# Allegro board oscilatorWien3.brd
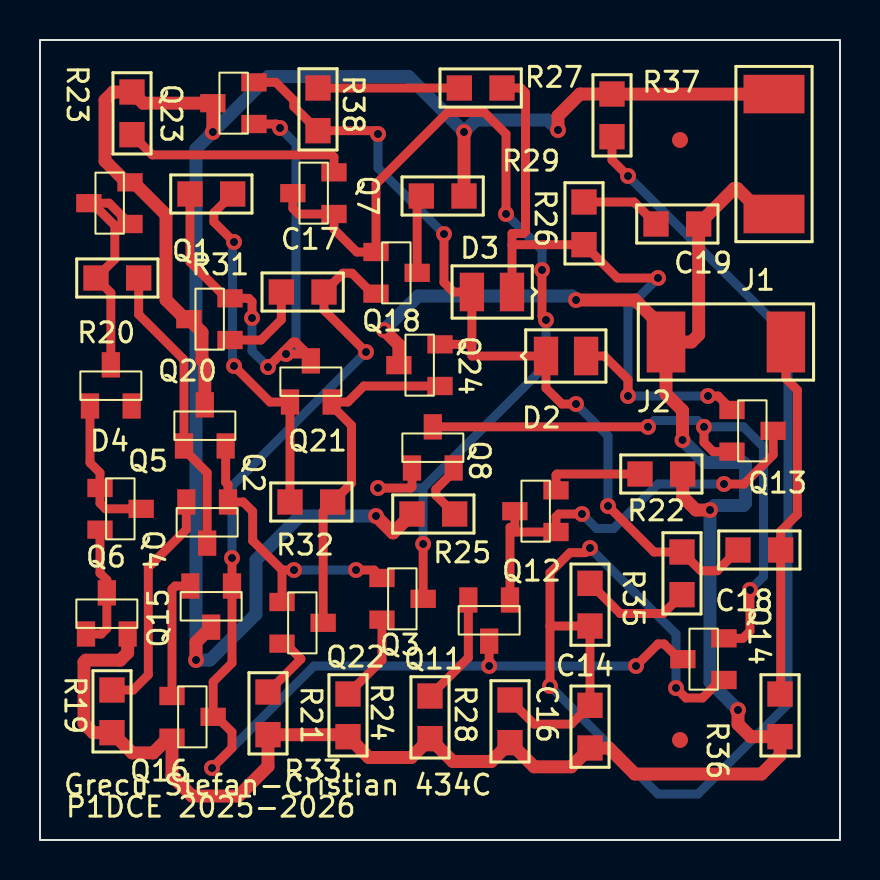
[diagram p0: board, top side]
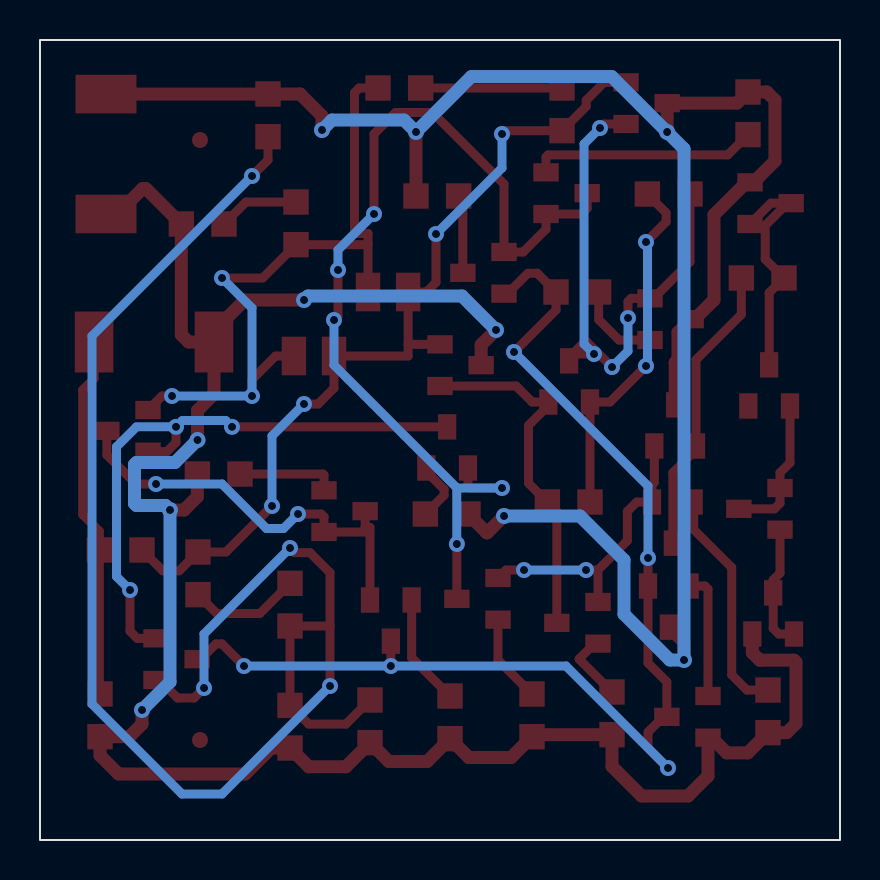
[diagram p1: board, bottom side, seen from below]

Outline 40 x 40 mm; copper layers: TOP, BOTTOM. Coordinates in mm from the lower left corner of the outline.
Outline path: rectangle 0,0 40,40

## Design rules (mm)
nets with their own width: min track width 0.45; nets N00205 N00310 N00314 N00318 N00332 N00346 N00397 N00507 N00543 N00654 N00701 N00847 N00851 N01052 N01056 N01336 N01569 N02051 N02116 N02144 N02274 N02283 N02412 N02667 N02782 N02871 N02919 N07776 N021020
nets with their own width: min track width 0.65; nets GND N00658

## Placement (name value [footprint] x y rotation side)
C14  1n  [SMC0805]  27.5 10.7 90 top
C16  1n  [SMC0805]  27.5 4.6 90 top
C17  10p  [SMC0805]  14.2 27.4 180 top
C18  4.7u  [SMC0805]  34.9 14.5 0 top
C19  4.7u  [SMC0805]  30.8 30.8 0 top
D2  1N4148  [SMD0805]  25.3 24.2 0 top
D3  1N4148  [SMD0805]  23.6 27.4 180 top
D4  BZX84C8V2  [TO236AA]  2.5 21.7 270 top
J1  CON2  [SMR2512]  36.7 31.3 90 top
J2  CON2  [SMR2512]  31.3 24.9 0 top
NOREF  -  [unnamed]  32 35 0 top
NOREF#2  -  [unnamed]  32 5 0 top
Q1  J309  [TO236AA]  4.5 30.8 0 top
Q2  BC817  [TO236AA]  7.2 19.7 270 top
Q3  BC817  [TO236AA]  17.1 13.1 180 top
Q4  BC817  [TO236AA]  9.4 16.9 90 top
Q5  BC817  [TO236AA]  3 17.6 180 top
Q6  BC817  [TO236AA]  2.3 10.3 270 top
Q7  BC807  [TO236AA]  14.7 31.3 0 top
Q8  BC807  [TO236AA]  18.6 18.6 270 top
Q11  BC817  [TO236AA]  23.5 12 90 top
Q12  BC817  [TO236AA]  25.8 15.4 0 top
Q13  BC807  [TO236AA]  34.6 21.5 180 top
Q14  BC807  [TO236AA]  34.2 8 0 top
Q15  BC817  [TO236AA]  9.6 12.7 90 top
Q16  BC817  [TO236AA]  6.6 7.2 180 top
Q18  BC817  [TO236AA]  16.8 29.4 180 top
Q20  BC817  [TO236AA]  9.5 25 0 top
Q21  BC817  [TO236AA]  12.5 21.9 270 top
Q22  BC817  [TO236AA]  12.1 11.9 180 top
Q23  BC817  [TO236AA]  10.7 35.8 0 top
Q24  BC807  [TO236AA]  20 22.7 0 top
R19  330  [SMR0805]  3.6 7.5 270 top
R20  4.7k  [SMR0805]  2.8 28.1 0 top
R21  330  [SMR0805]  15.4 7.3 270 top
R22  470m  [SMR0805]  30 18.3 0 top
R23  330  [SMR0805]  4.6 37.4 270 top
R24  470m  [SMR0805]  19.5 7.2 270 top
R25  150  [SMR0805]  18.6 16.3 0 top
R26  10k  [SMR0805]  27.2 31.9 270 top
R27  10k  [SMR0805]  23.1 37.6 180 top
R28  22k  [SMR0805]  23.5 7 270 top
R29  150  [SMR0805]  21.2 32.2 180 top
R31  1.5k  [SMR0805]  7.5 32.3 0 top
R32  680  [SMR0805]  12.5 16.9 0 top
R33  82  [SMR0805]  11.4 7.4 270 top
R35  10k  [SMR0805]  32.1 14.4 270 top
R36  820  [SMR0805]  37 7.3 270 top
R37  22k  [SMR0805]  28.6 37.3 270 top
R38  22k  [SMR0805]  13.9 37.6 270 top

## Library data of the parts
C14 C16-C19 = C
D2 = 1N4148_8
D3 = 1N4148_6
D4 = BZX84C8V2_3
J1 J2 = CON2
Q1 = J309_4
Q2-Q6 Q11 Q12 Q15 Q16 Q20-Q23 = BC817_0
Q7 = BC807_2
Q8 Q13 Q24 = BC807_0
Q14 = BC807_1
Q18 = BC817_1
R19-R29 R31-R33 R35-R38 = R

## Footprints (pads in the part's own frame, mm; a bottom-side part is the same pattern mirrored in y, then rotated)
SMC0805
  rect 1.27x1.27 smd: 1(0,0) 2(2.134,0)
SMD0805
  rect 1.219x1.93 smd: A(2.007,0) C(0,0)
SMR0805
  rect 1.27x1.27 smd: 1(0,0) 2(2.134,0)
SMR2512
  rect 1.93x3.048 smd: 1(0,0) 2(5.994,0)
TO236AA
  rect 1.27x0.914 smd: 1(0,0) 2(0,2.083) 3(-2.057,1.041)
unnamed
  round 0.8 smd: (0,0)

## Nets
GND: C16.1 C19.2 J1.1 J2.1 Q6.2(E) Q16.2(E) Q24.3 R19.2 R21.2 R22.2 R24.2 R28.2 R33.2 R36.2
N00205: Q5.2(E) Q6.1 Q6.3
N00310: Q3.2(E) R21.1
N00314: Q4.2(E) R19.1
N00318: Q2.2(E) Q3.1 Q4.1 Q22.1
N00332: Q2.1 Q4.3 R20.2
N00346: D4.3 Q1.1 Q1.3 R20.1
N00397: D4.1 Q5.1 Q5.3
N00507: Q3.3 Q7.1 Q7.3 Q8.1 Q18.1
N00543: Q7.2(E) R23.2
N00654: Q8.2(E) R25.2
N00658: J1.2 Q1.2(S) Q2.3 Q15.3 Q20.3 Q23.3 R23.1 R25.1 R29.1 R37.1
N00701: Q8.3 Q13.2(E) Q14.2(E)
N00847: Q11.1 Q12.1 Q12.3 Q13.3
N00851: C17.1 Q11.3 Q14.3 Q15.1 Q16.3 Q18.2(E)
N01052: Q11.2(E) R24.1
N01056: Q12.2(E) R22.1
N01336: Q15.2(E) Q16.1
N01569: Q18.3 R29.2
N02051: Q21.1 R31.2 R32.1
N02116: C17.2 Q20.1
N02144: Q21.2(E) Q22.3 Q24.1 R32.2
N02274: Q20.2(E) Q21.3 Q23.1 R31.1
N02283: C18.1 D2.C(CAT) D3.A Q23.2(E) Q24.2(E) R35.1 R38.2
N02412: C14.1 C16.2 Q14.1 R28.1 R37.2
N02667: C14.2 R35.2
N02782: C18.2 J2.2 R36.1
N02871: D2.A D3.C(CAT) Q13.1 R26.2 R27.1
N02919: C19.1 R26.1
N07776: R27.2 R38.1
N021020: Q22.2(E) R33.1

Pads without a net: D4 2

## Via types
v1: diameter 0.8, hole 0.4, TOP to BOTTOM, 44 vias

## Routing (per net, layer and track width the routed paths; a pad name or vN(x,y) marks a point on that pad's centre or on a via; arc(x,y) is an arc through that point)
GND: length 110.8
  TOP w0.65: v1(34.9,6.5) 34.9,5.8 35.53,5.17 R36.2 37,4.23 36.07,3.3 29.74,3.3 28.44,4.6 C16.1 26.56,3.66 24.71,3.66 R28.2 22.56,3.93 20.64,3.93 R24.2 18.56,4.13 16.44,4.13 R21.2 15.3,5.27 R33.2 11.4,3.68 9.92,2.2 7.6,2.2 6.6,3.2 Q16.2 6.42,5.12 5.66,4.36 4.61,4.36 R19.2 2.66,5.37 2.2,5.83 2.2,8.89 2.3,8.99 4.01,8.99 4.38,9.36 Q6.2 ; Q24.3 17.94,24.76 v1(17.2,25.5) ; J2.1 32.57,24.9 32.93,25.26 C19.2 34.7,32.57 34.87,32.57 36.14,31.3 J1.1 ; J2.1 31.3,25.46 29.76,27 v1(26.8,27) ; J2.1 31.3,22.3 32.12,21.48 v1(32.12,20) ; v1(33.5,16.5) 32.8,16.5 32.13,17.16 R22.2
  BOTTOM w0.65: v1(34.9,6.5) 33.5,7.9 v1(33.5,16.5) 33.73,16.73 35.17,16.73 35.27,16.82 35.27,18.77 35.17,18.88 33.25,18.88 v1(32.12,20) ; v1(26.8,27) 26.6,27.2 18.9,27.2 v1(17.2,25.5)
N00205: length 6.2
  TOP w0.45: Q6.1 3.06,10.3 3.34,10.58 Q6.3 3.34,13 3,13.34 Q5.2
N00310: length 4.4
  TOP w0.45: R21.1 17.1,9 Q3.2
N00314: length 11.6
  TOP w0.45: Q4.2 7.32,15.53 5.42,13.62 5.42,8.26 4.66,7.5 R19.1
N00318: length 14.6
  TOP w0.45: Q2.2 9.28,17.89 9.4,17.77 Q4.1 10.16,16.9 10.63,16.43 10.63,14.97 12.1,13.5 ; Q22.1 12.1,13.5 ; 12.1,13.5 v1(12.7,13.5) ; v1(15.8,13.5) 16.7,13.5 Q3.1
  BOTTOM w0.45: v1(12.7,13.5) v1(15.8,13.5)
N00332: length 14.7
  TOP w0.45: R20.2 4.93,26.28 7.2,24.01 Q2.1 7.2,19.52 8.36,18.36 Q4.3
N00346: length 11.9
  TOP w0.45: D4.3 3.54,27.36 R20.1 3.74,29.04 3.74,30.72 2.62,31.84 Q1.3 3.46,31.84 Q1.1
N00397: length 7.2
  TOP w0.45: Q5.3 3.28,16.56 3,16.84 Q5.1 3,18.36 2.5,18.86 D4.1
N00507: length 49.6
  TOP w0.45: v1(25.1,28.5) 25.1,26.2 v1(25.3,26) ; Q7.3 12.64,31.58 12.92,31.3 Q7.1 14.7,30.54 15.84,29.4 Q18.1 16.8,32.8 20.38,36.38 22.23,36.38 23.3,35.3 v1(23.3,31.3) ; Q8.1 18.6,17.66 18.54,17.6 v1(16.9,17.6) ; Q3.3 v1(19.16,14.8)
  BOTTOM w0.45: v1(25.3,26) 25.3,23.74 19.16,17.6 ; v1(25.1,28.5) 25.1,29.5 v1(23.3,31.3) ; 19.16,17.6 v1(19.16,14.8) ; 19.16,17.6 v1(16.9,17.6)
N00543: length 11.3
  TOP w0.45: Q7.2 14.7,34.14 14.59,34.26 5.61,34.26 R23.2
N00654: length 3.1
  TOP w0.45: R25.2 19.79,17.24 19.79,17.53 20.68,18.42 Q8.2
N00658: length 104.8
  TOP w0.65: v1(25.9,35.5) 25.9,36.2 27,37.3 R37.1 28.61,37.29 J1.2 ; v1(8.64,35.4) Q23.3 5.16,36.84 R23.1 3.66,37.4 3.25,36.99 3.25,33.95 4.32,32.88 Q1.2 4.68,32.88 6.3,31.26 6.3,27.01 7.26,26.04 Q20.3 8.1,25.38 8.1,24.01 8.24,23.87 Q2.3 ; v1(21.2,35.4) R29.1 ; R25.1 17.66,15.36 17.64,15.36 v1(16.8,16.2) ; v1(7.8,9) 7.8,9.88 Q15.3
  BOTTOM w0.65: v1(16.8,16.2) 13,16.2 10.8,14 10.8,11.3 8.5,9 v1(7.8,9) 7.8,34.56 v1(8.64,35.4) 11.41,38.17 18.43,38.17 v1(21.2,35.4) 21.8,36 25.4,36 v1(25.9,35.5)
N00701: length 30.5
  TOP w0.45: v1(35.5,12.5) 35.5,10.44 35.14,10.08 Q14.2 ; Q8.3 v1(30.4,20.66) ; Q13.2 33.66,19.42 33.2,19.88 v1(33.2,20.66)
  BOTTOM w0.45: v1(35.5,12.5) 36.17,13.18 36.17,19.66 35.17,20.66 v1(33.2,20.66) 32.88,20.98 30.72,20.98 v1(30.4,20.66)
N00847: length 21.7
  TOP w0.45: v1(34.2,17.8) 35.2,17.8 36.66,19.26 Q13.3 ; 23.74,15.63 23.5,15.63 Q11.1 ; 23.74,15.63 23.74,15.4 Q12.1 25.8,16.16 25.94,16.3 v1(27.1,16.3) ; 23.74,15.63 Q12.3
  BOTTOM w0.45: v1(34.2,17.8) 30.9,17.8 28.68,15.57 27.82,15.57 v1(27.1,16.3)
N00851: length 59.8
  TOP w0.45: Q11.3 v1(22.46,8.7) ; Q14.3 31.96,9.04 31.2,9.8 30.9,9.8 v1(29.8,8.7) ; v1(16.3,24.4) 14.2,26.5 C17.1 15.14,28.34 15.6,28.34 16.62,27.32 Q18.2 ; v1(8.6,3.6) 9.6,4.6 9.6,5.4 8.84,6.16 Q16.3 8.66,7.91 9.6,8.85 Q15.1 v1(9.6,14.1)
  BOTTOM w0.45: v1(29.8,8.7) v1(22.46,8.7) 13.7,8.7 v1(8.6,3.6) ; v1(9.6,14.1) 9.6,17.7 v1(16.3,24.4)
N01052: length 5.6
  TOP w0.45: R24.1 21.42,9.12 Q11.2
N01056: length 5
  TOP w0.45: Q12.2 25.8,18.24 25.86,18.3 R22.1
N01336: length 6.3
  TOP w0.45: Q15.2 6.76,12.7 6.6,12.54 Q16.1
N01569: length 3.9
  TOP w0.45: Q18.3 18.86,31.99 R29.2
N02051: length 18
  TOP w0.45: v1(9.7,29.9) 8.69,30.91 8.69,31.36 R31.2 ; v1(9.7,23.7) 11.5,21.9 Q21.1 R32.1
  BOTTOM w0.45: v1(9.7,29.9) 9.62,29.82 9.62,23.77 v1(9.7,23.7)
N02116: length 4.4
  TOP w0.45: C17.2 12.07,26.02 11.05,25 Q20.1
N02144: length 17.8
  TOP w0.45: Q24.1 16.19,22.7 15.39,21.9 Q21.2 14.58,21.72 15.57,20.73 15.57,17.84 R32.2 14.16,16.42 Q22.3
N02274: length 28.7
  TOP w0.45: v1(12,35.6) 11.8,35.8 Q23.1 ; R31.1 7.5,28.91 9.32,27.08 Q20.2 10.44,27.08 10.6,26.92 v1(10.6,26.1) ; v1(11.4,23.65) 12.65,24.9 12.78,24.9 13.54,24.14 Q21.3 13.2,24.3 v1(12.3,24.3)
  BOTTOM w0.45: v1(12,35.6) 12.8,34.8 12.8,24.8 v1(12.3,24.3) ; v1(11.4,23.65) 10.6,24.45 v1(10.6,26.1)
N02283: length 43.8
  TOP w0.45: 21.59,24.78 D3.A 20.68,27.4 20.2,27.88 v1(20.2,30.3) ; 21.59,24.78 21.59,24.2 D2.C 25.3,22.6 26.1,21.8 v1(26.8,21.8) ; 21.59,24.78 Q24.2 ; v1(28.4,16.7) 30.7,14.4 R35.1 33.04,13.46 33.86,13.46 C18.1 ; v1(16.9,35.3) 16.73,35.47 R38.2 12.69,36.68 12.69,36.98 11.79,37.88 Q23.2
  BOTTOM w0.45: v1(20.2,30.3) 16.9,33.6 v1(16.9,35.3) ; v1(26.8,21.8) 28.4,20.2 v1(28.4,16.7)
N02412: length 78.8
  TOP w0.45: R37.2 28.6,34 v1(29.4,33.2) ; R28.1 24.71,5.79 26.56,5.79 C16.2 C14.1 25.5,10.7 ; v1(25.5,7.7) 25.5,10.7 ; 25.5,10.7 25.5,13.37 26.5,14.37 27.27,14.37 v1(27.5,14.6) ; v1(31.8,7.6) 32.3,7.1 33.12,7.1 34.02,8 Q14.1
  BOTTOM w0.45: v1(29.4,33.2) 37.4,25.2 37.4,6.8 32.9,2.3 30.9,2.3 v1(25.5,7.7) ; v1(31.8,7.6) 31.8,10.3 v1(27.5,14.6)
N02667: length 5.6
  TOP w0.45: C14.2 29.01,11.33 31.16,11.33 R35.2
N02782: length 18.2
  TOP w0.45: J2.2 37.29,23.07 37.87,22.5 37.87,16.27 37.03,15.44 C18.2 37.03,7.33 R36.1
N02871: length 35.3
  TOP w0.45: 23.6,29.77 23.6,30.32 24.18,30.32 24.27,30.43 24.27,37.36 24.04,37.6 R27.1 ; 23.6,29.77 R26.2 28.87,28.1 v1(30.9,28.1) ; 23.6,29.77 D3.C ; D2.A 28.22,24.2 29.4,23.02 v1(29.4,22.2) ; v1(33.4,22.2) 33.9,22.2 Q13.1
  BOTTOM w0.45: v1(33.4,22.2) v1(29.4,22.2) 29.4,26.6 v1(30.9,28.1)
N02919: length 4.1
  TOP w0.45: C19.1 29.7,31.9 R26.1
N07776: length 7.1
  TOP w0.45: R38.1 R27.2
N021020: length 3.6
  TOP w0.45: R33.1 13.04,9.04 13.04,9.06 12.28,9.82 Q22.2

## Text on the board
Ref Des/Silkscreen Top: Grecu Stefan-Cristian 434C | P1DCE 2025-2026
XSECTION_CHART: *  SURFACE | L1 TOP CONDUCTOR | *  DIELECTRIC | L2 BOTTOM CONDUCTOR | DESIGN CROSS SECTION CHART | ___________________________ | TOTAL THICKNESS 0.26416 MM | 1-2
NCLEGEND-1-2: FIGURE | FINISHED_SIZE | 0.4 | DRILL CHART: TOP to BOTTOM | ALL UNITS ARE IN MILLIMETERS | PLATED | QTY | 44 | TOTAL HOLES:
